# Altium PCB 4x4_Pan.PcbDoc
Units mm, origin at the board's own origin, x right, y up, seen from the top; angles counter-clockwise.
Board outline 200 x 200 mm, 2 copper layers (Top Layer, Bottom Layer); 36 components, 11 nets, 304 pads, 8 vias.
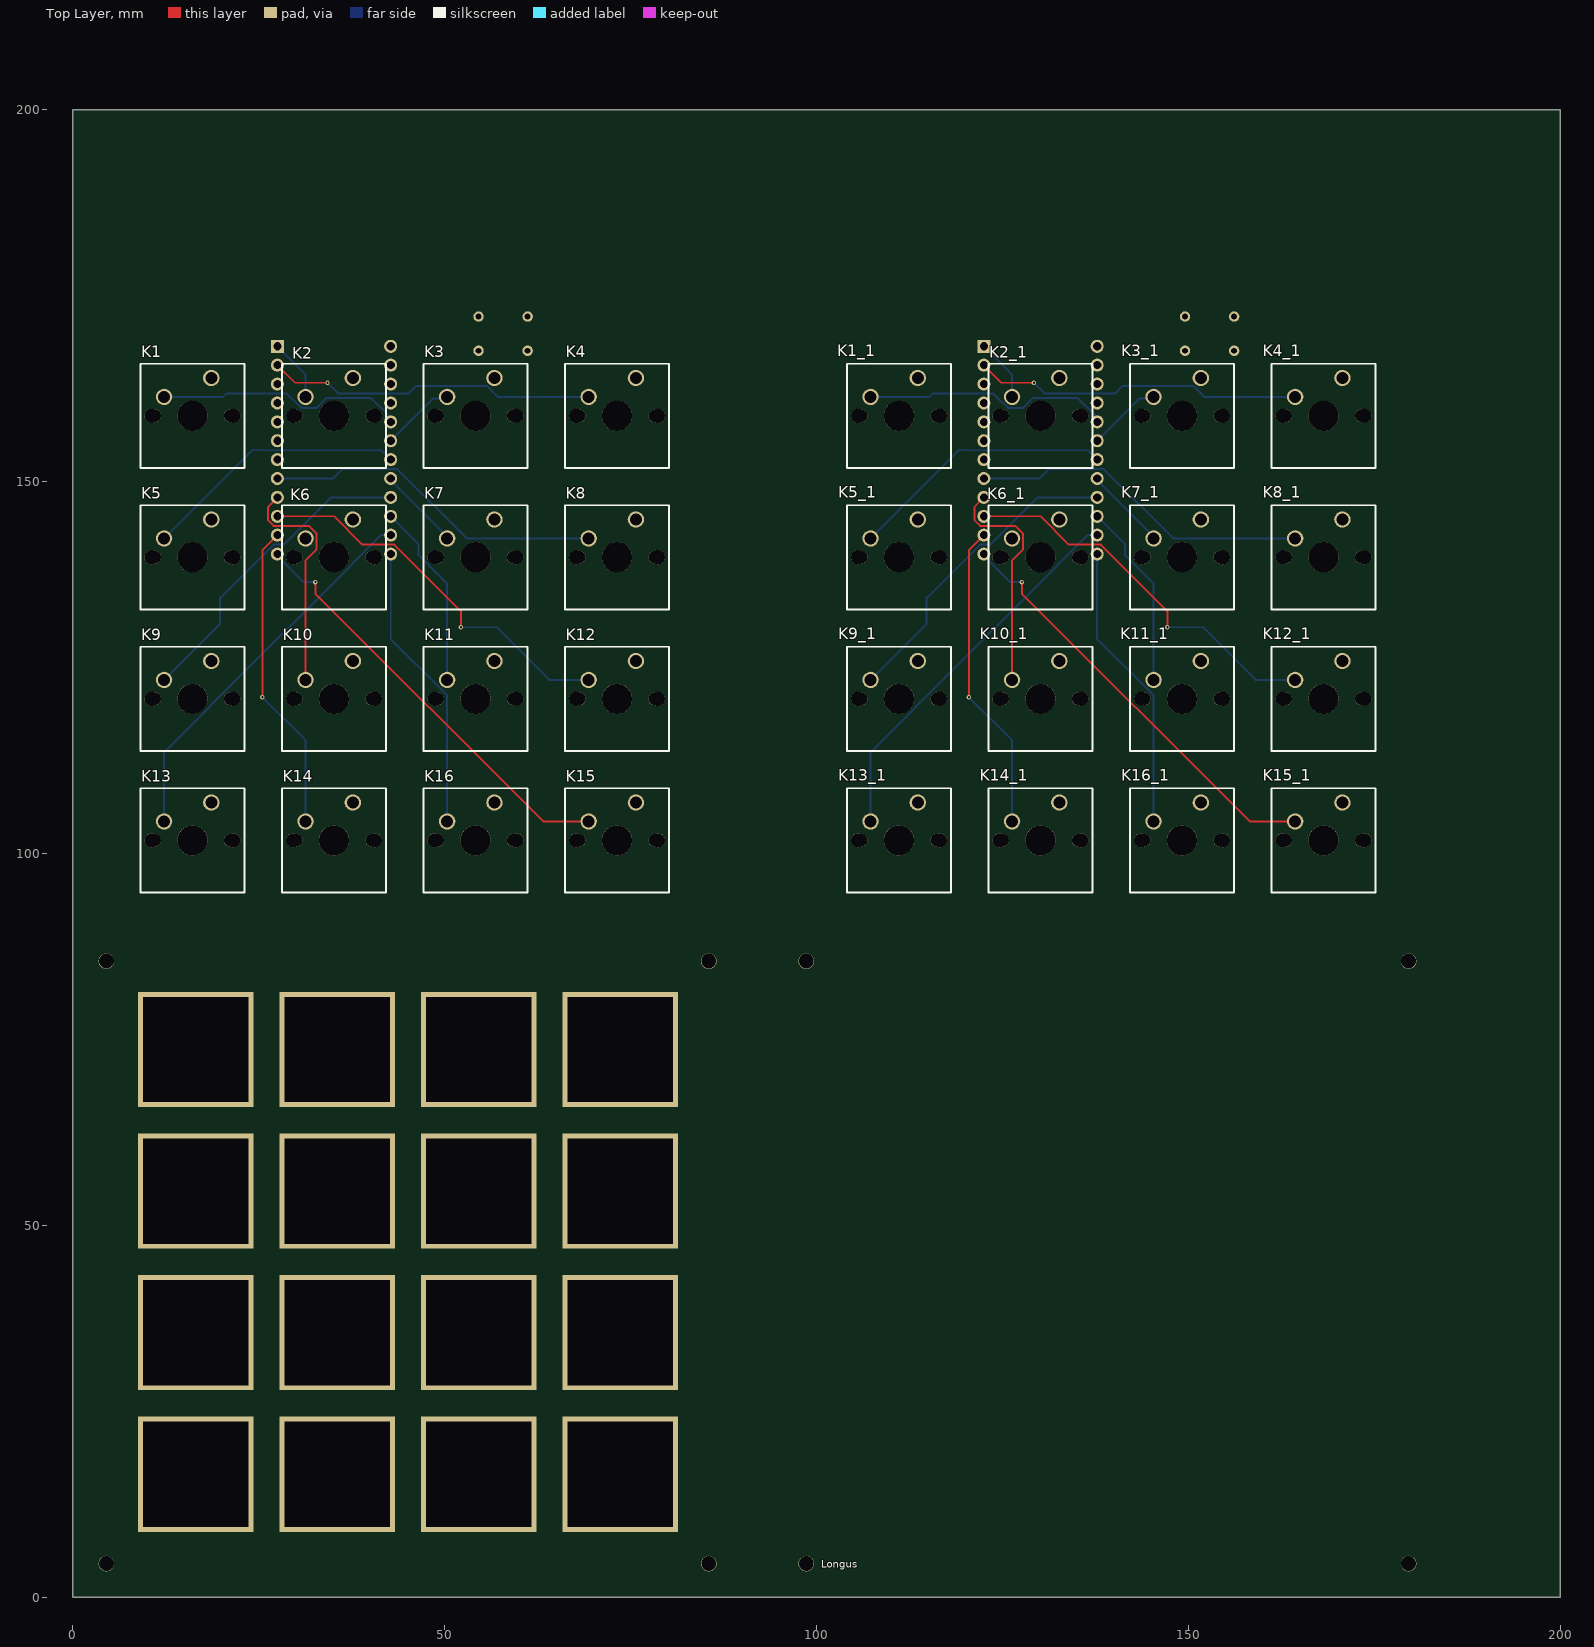
[diagram p0: Top Layer view]
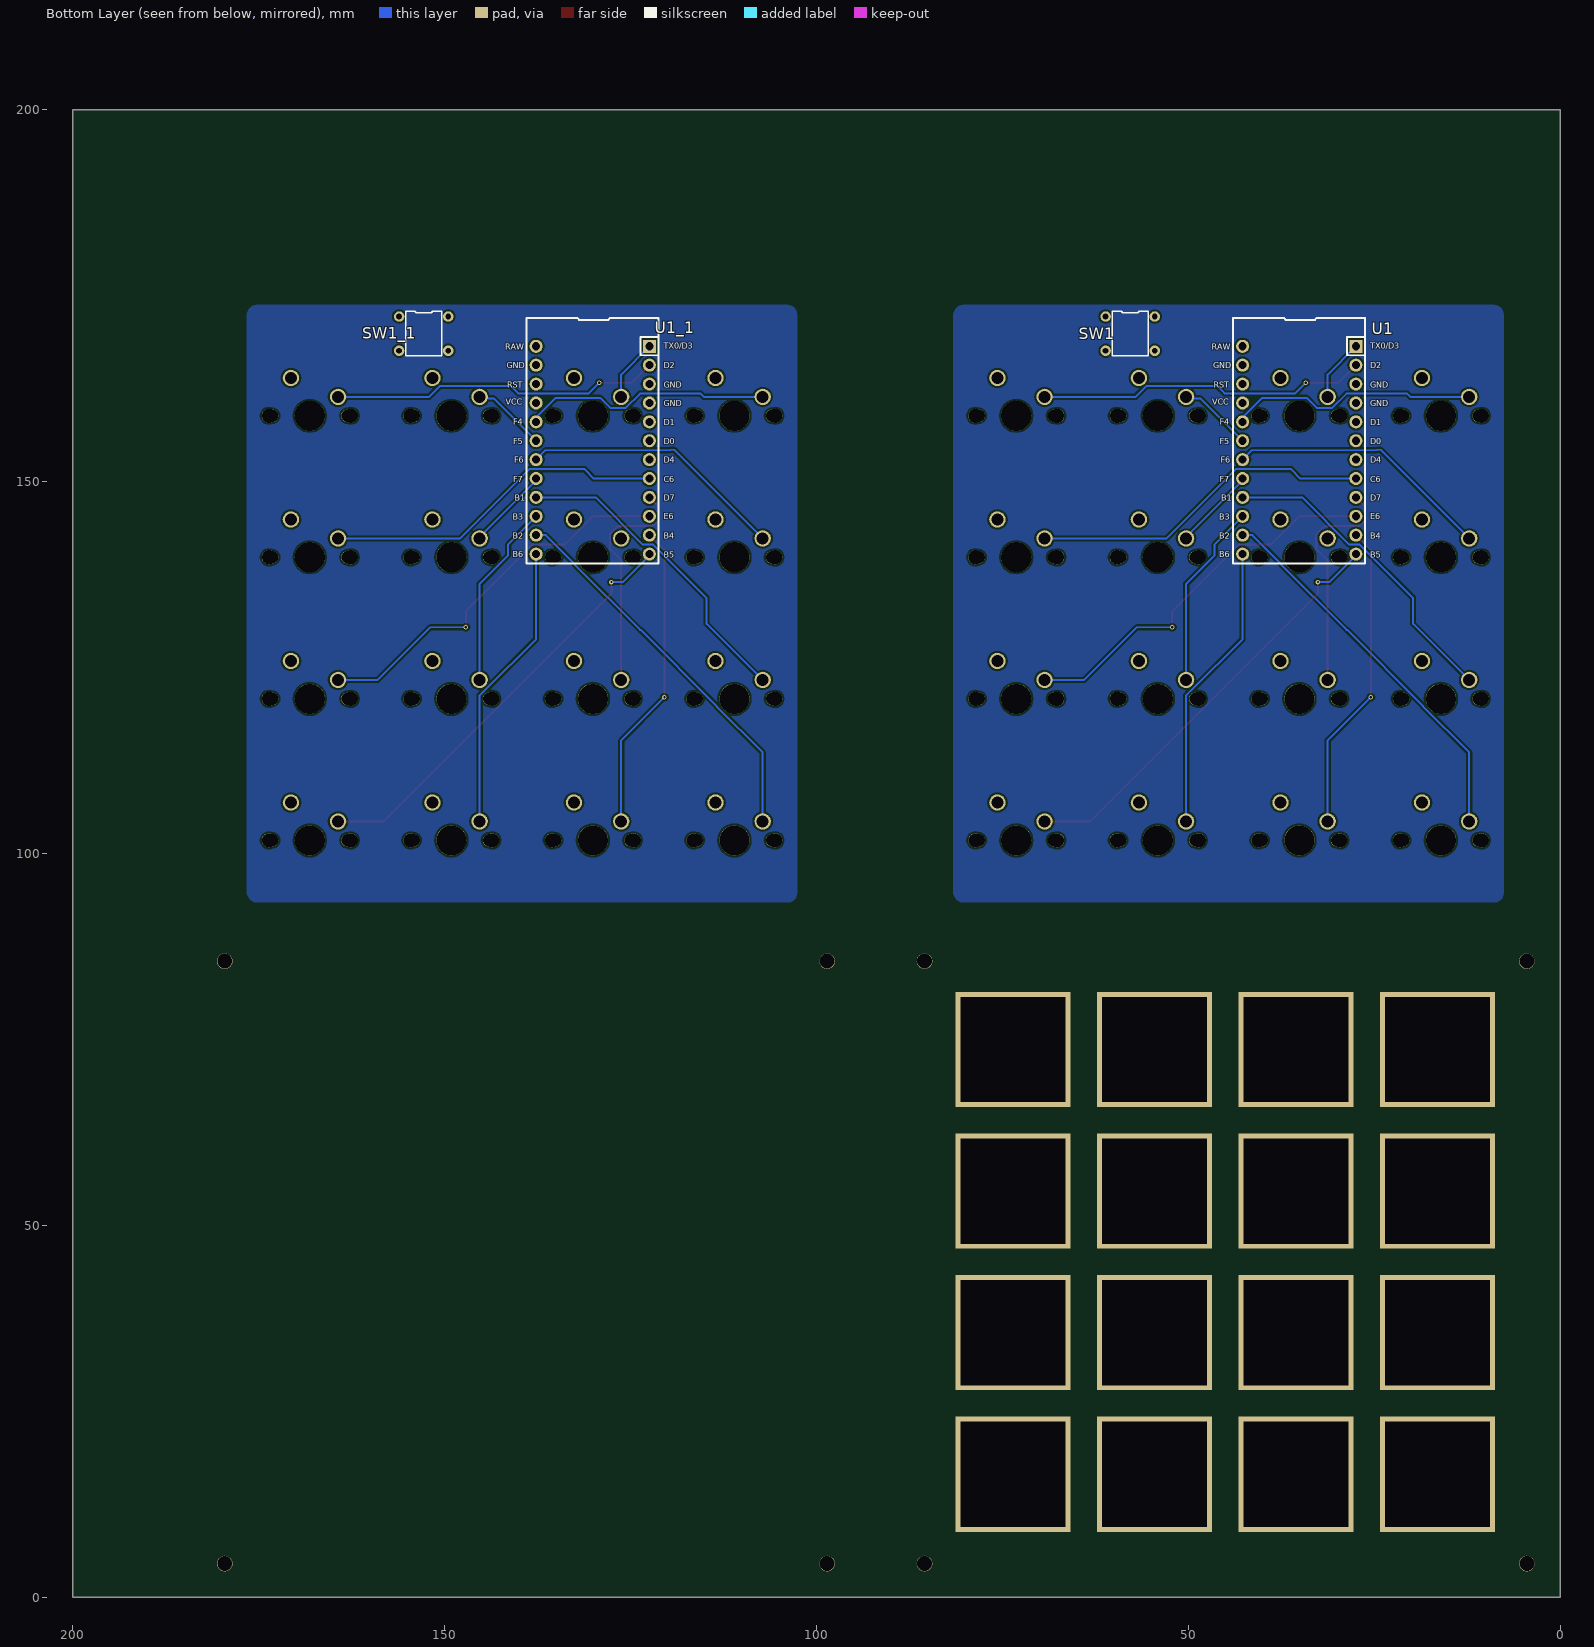
[diagram p1: Bottom Layer view, seen from below]

## Layer stack, top to bottom
Top Solder: solder mask 0.0102, Solder Resist, Dk 3.5
Top Layer: signal copper 0.0356
Dielectric 1: dielectric 0.32, FR-4, Dk 4.8
Bottom Layer: signal copper 0.0356
Bottom Solder: solder mask 0.0102, Solder Resist, Dk 3.5

## Board outline
0,0 0,200 200,200 200,0

## Design rules (kind name [scope] priority, off if disabled: settings)
Clearance [All] p1: gap=0.254 ignorepadtopadclearanceinfootprint=FALSE except(0: Arc-Hole Track-Hole SMDPad-Hole THPad-Hole Via-Hole Fill-Hole Poly-Hole Region-Hole Text-Hole)
PolygonConnect [All] p1: connectstyle=Relief reliefconductorwidth=0.254 reliefentries=4 polygonreliefangle="90 Angle" airgapwidth=0.254
RoutingVias [All] p1: holewidth=0.711 width=1.27 viastyle="Through Hole" minholewidth=0.711 minwidth=1.27 maxholewidth=0.711 maxwidth=1.27
SolderMaskExpansion [All] p1: expansion=0.102 istentingtop=FALSE
Width [All] p1: maxlimit=0.254 minlimit=0.254 preferedwidth=0.254
30 further rules are at their usual default settings.

## Classes and differential pairs
component class Macropadmod: SW?

## Components (designator, comment, footprint, x,y, rotation, side; value= is the part's Value field where it differs from the comment)
K1 "KEYSW-canadian_parts" Socket 9.015,151.842 r0 top
K1_1 "KEYSW-canadian_parts" Socket 104.015,151.842 r0 top (schematic designator K1)
K2 "KEYSW-canadian_parts" Socket 28.045,151.842 r0 top
K2_1 "KEYSW-canadian_parts" Socket 123.045,151.842 r0 top (schematic designator K2)
K3 "KEYSW-canadian_parts" Socket 47.075,151.842 r0 top
K3_1 "KEYSW-canadian_parts" Socket 142.074,151.842 r0 top (schematic designator K3)
K4 "KEYSW-canadian_parts" Socket 66.105,151.842 r0 top
K4_1 "KEYSW-canadian_parts" Socket 161.104,151.842 r0 top (schematic designator K4)
K5 "KEYSW-canadian_parts" Socket 9.015,132.812 r0 top
K5_1 "KEYSW-canadian_parts" Socket 104.014,132.812 r0 top (schematic designator K5)
K6 "KEYSW-canadian_parts" Socket 28.045,132.812 r0 top
K6_1 "KEYSW-canadian_parts" Socket 123.044,132.812 r0 top (schematic designator K6)
K7 "KEYSW-canadian_parts" Socket 47.075,132.812 r0 top
K7_1 "KEYSW-canadian_parts" Socket 142.075,132.812 r0 top (schematic designator K7)
K8 "KEYSW-canadian_parts" Socket 66.105,132.812 r0 top
K8_1 "KEYSW-canadian_parts" Socket 161.104,132.812 r0 top (schematic designator K8)
K9 "KEYSW-canadian_parts" Socket 9.015,113.782 r0 top
K9_1 "KEYSW-canadian_parts" Socket 104.014,113.782 r0 top (schematic designator K9)
K10 "KEYSW-canadian_parts" Socket 28.045,113.782 r0 top
K10_1 "KEYSW-canadian_parts" Socket 123.045,113.782 r0 top (schematic designator K10)
K11 "KEYSW-canadian_parts" Socket 47.075,113.782 r0 top
K11_1 "KEYSW-canadian_parts" Socket 142.075,113.782 r0 top (schematic designator K11)
K12 "KEYSW-canadian_parts" Socket 66.105,113.782 r0 top
K12_1 "KEYSW-canadian_parts" Socket 161.104,113.782 r0 top (schematic designator K12)
K13 "KEYSW-canadian_parts" Socket 9.015,94.752 r0 top
K13_1 "KEYSW-canadian_parts" Socket 104.014,94.752 r0 top (schematic designator K13)
K14 "KEYSW-canadian_parts" Socket 28.045,94.752 r0 top
K14_1 "KEYSW-canadian_parts" Socket 123.044,94.752 r0 top (schematic designator K14)
K15 "KEYSW-canadian_parts" Socket 66.105,94.752 r0 top
K15_1 "KEYSW-canadian_parts" Socket 161.104,94.752 r0 top (schematic designator K15)
K16 "KEYSW-canadian_parts" Socket 47.075,94.752 r0 top
K16_1 "KEYSW-canadian_parts" Socket 142.074,94.752 r0 top (schematic designator K16)
SW1 "SW_Push" RESET 59.635,166.485 r90 bottom
SW1_1 "SW_Push" RESET 154.635,166.485 r90 bottom (schematic designator SW1)
U1 "ProMicro-keebio" PRO-MICRO 42.725,168.185 r180 bottom
U1_1 "ProMicro-keebio" PRO-MICRO 137.725,168.185 r180 bottom (schematic designator U1)

## Footprints (in the part's own frame and the unit in brackets; to place one, negate y for a bottom-side part, rotate by r counter-clockwise, add the part's x,y. Pads: shape width x height; smd on the part's side, far side on the other; paste and mask are expansions set on the pad)
PRO-MICRO [mm]
  rect 1.753x1.753 hole 1.092: 1(15.24,0)
  round 1.753 hole 1.092: 2(15.24,-2.54) 3(15.24,-5.08) 4(15.24,-7.62) 5(15.24,-10.16) 6(15.24,-12.7) 7(15.24,-15.24) 8(15.24,-17.78) 9(15.24,-20.32) 10(15.24,-22.86) 11(15.24,-25.4) 12(15.24,-27.94) 13(0,-27.94) 14(0,-25.4) 15(0,-22.86) 16(0,-20.32) 17(0,-17.78) 18(0,-15.24) 19(0,-12.7) 20(0,-10.16) 21(0,-7.62) 22(0,-5.08) 23(0,-2.54) 24(0,0)
  silkscreen extent -1.27,-29.21 16.48,3.81
RESET [mm]
  round 1.4 hole 0.8: 1(5.7,1.5) 2(5.7,-5.1) 3(1.1,1.5) 4(1.1,-5.1)
  silkscreen extent 0.4,-4.2 6.4,0.6
Socket [mm]
  round 2.2 hole 1.6: 1(3.24,9.54) 2(9.59,12.08)
  round 1.9 hole 1.9: 3(1.55,7) 3(12.55,7)
  round 1.7 hole 1.7: 3(1.97,7) 3(12.13,7)
  round 4.05 hole 4.05: 3(7.05,7)
  silkscreen extent 0.05,0 14.05,14

## Free pads (board coordinates)
  round 2.1 hole 2: 3(4.495,4.502) 3(4.495,85.502) 3(85.495,4.502) 3(85.495,85.502) 3(98.595,4.502) 3(98.595,85.502) 3(179.595,4.502) 3(179.595,85.502)
  rect 15.5x15.5 hole 14.1 square: 4(16.505,16.527) 4(16.505,35.557) 4(16.505,54.587) 4(16.505,73.617) 4(35.535,16.527) 4(35.535,35.557) 4(35.535,54.587) 4(35.535,73.617) 4(54.564,16.527) 4(54.564,35.557) 4(54.564,54.587) 4(54.564,73.617) 4(73.594,16.527) 4(73.594,35.557) 4(73.594,54.587) 4(73.594,73.617)

## Via types
v1: diameter 0.6, hole 0.3, Top Layer to Bottom Layer, 8 vias

## Nets (pads, with @x,y where several pads share a name; then routed paths per layer and width w, separated by ;. In a path a pad name is that pad's centre, name@x,y a point inside that pad or via, vN(x,y) a via of type N, cw(c..) or ccw(c..) an arc to the next point about the centre after c; other vN are vias at no path point)
GND: 
NetK1_1: 
NetK2_1: 
NetK3_1: 
NetK4_1: 
NetK5_1: 
NetK6_1: 
NetK7_1: 
NetK8_1: 
NetK9_1: 
NetSW1_1: 
pads on no net: K1.1 K1.2 K1.3 K1_1.1 K1_1.2 K1_1.3 K2.1 K2.2 K2.3 K2_1.1 K2_1.2 K2_1.3 K3.1 K3.2 K3.3 K3_1.1 K3_1.2 K3_1.3 K4.1 K4.2 K4.3 K4_1.1 K4_1.2 K4_1.3 K5.1 K5.2 K5.3 K5_1.1 K5_1.2 K5_1.3 K6.1 K6.2 K6.3 K6_1.1 K6_1.2 K6_1.3 K7.1 K7.2 K7.3 K7_1.1 K7_1.2 K7_1.3 K8.1 K8.2 K8.3 K8_1.1 K8_1.2 K8_1.3 K9.1 K9.2 K9.3 K9_1.1 K9_1.2 K9_1.3 K10.1 K10.2 K10.3 K10_1.1 K10_1.2 K10_1.3 K11.1 K11.2 K11.3 K11_1.1 K11_1.2 K11_1.3 K12.1 K12.2 K12.3 K12_1.1 K12_1.2 K12_1.3 K13.1 K13.2 K13.3 K13_1.1 K13_1.2 K13_1.3 K14.1 K14.2 K14.3 K14_1.1 K14_1.2 K14_1.3 K15.1 K15.2 K15.3 K15_1.1 K15_1.2 K15_1.3 K16.1 K16.2 K16.3 K16_1.1 K16_1.2 K16_1.3 SW1.1 SW1.2 SW1.3 SW1.4 SW1_1.1 SW1_1.2 SW1_1.3 SW1_1.4 U1.1 U1.2 U1.3 U1.4 U1.5 U1.6 U1.7 U1.8 U1.9 U1.10 U1.11 U1.12 U1.13 U1.14 U1.15 U1.16 U1.17 U1.18 U1.19 U1.20 U1.21 U1.22 U1.23 U1.24 U1_1.1 U1_1.2 U1_1.3 U1_1.4 U1_1.5 U1_1.6 U1_1.7 U1_1.8 U1_1.9 U1_1.10 U1_1.11 U1_1.12 U1_1.13 U1_1.14 U1_1.15 U1_1.16 U1_1.17 U1_1.18 U1_1.19 U1_1.20 U1_1.21 U1_1.22 U1_1.23 U1_1.24
copper on no net: | length 1063.4
  Top Layer w0.254: v1(25.475,121) 25.475,140.775 27.485,142.785 ; 27.485,145.325 35.107,145.325 38.905,141.527 43.221,141.527 52.175,132.573 v1(52.175,130.4) ; 27.485,147.865 26.228,146.607 26.228,144.804 26.989,144.043 31.688,144.043 32.766,142.965 32.766,140.886 31.285,139.405 31.285,123.322 ; 27.485,165.645 29.855,163.275 v1(34.225,163.275) ; v1(32.6,136.475) 32.6,134.924 63.232,104.292 69.345,104.292 ; v1(120.475,121) 120.475,140.775 122.485,142.785 ; 122.485,145.325 130.107,145.325 133.905,141.527 138.221,141.527 147.175,132.573 v1(147.175,130.4) ; 122.485,147.865 121.227,146.607 121.227,144.804 121.989,144.043 126.688,144.043 127.766,142.965 127.766,140.886 126.285,139.405 126.285,123.322 ; 122.485,165.645 124.855,163.275 v1(129.225,163.275) ; v1(127.6,136.475) 127.6,134.924 158.232,104.292 164.344,104.292
  Bottom Layer w0.254: 12.255,104.292 12.255,113.569 18.471,119.785 18.471,119.849 28.675,130.054 28.739,130.054 37.501,138.815 37.501,138.879 41.407,142.785 42.725,142.785 ; 12.255,123.322 19.795,130.863 19.795,134.334 26.989,141.527 28.366,141.527 34.703,147.865 42.725,147.865 ; 12.255,142.352 24.178,154.275 24.635,154.275 24.707,154.203 41.468,154.203 42.725,152.945 ; 12.255,161.382 20.173,161.382 20.614,161.823 28.75,161.823 30.671,159.901 32.751,159.901 34.098,161.248 40.071,161.248 42.438,158.881 42.438,158.312 42.725,158.025 ; v1(25.475,121) 31.285,115.19 31.285,104.292 ; 27.485,140.245 27.485,140.039 31.049,136.475 v1(32.6,136.475) ; 27.485,150.405 34.94,150.405 36.197,151.663 43.638,151.663 52.948,142.352 69.345,142.352 ; 27.485,168.185 31.285,164.385 31.285,161.382 ; v1(34.225,163.275) 35.653,161.847 45.133,161.847 46.149,162.863 55.629,162.863 57.11,161.382 69.345,161.382 ; 42.725,140.245 42.725,128.817 49.701,121.841 49.727,121.841 50.315,121.253 50.315,104.292 ; 42.725,145.325 46.477,141.573 46.477,140.077 50.315,136.24 50.315,123.322 ; 42.725,150.405 42.725,150.173 50.315,142.584 50.315,142.352 ; 42.725,155.485 48.428,161.188 50.12,161.188 50.315,161.382 ; v1(52.175,130.4) 56.957,130.4 64.035,123.322 69.345,123.322 ; 107.254,104.292 107.254,113.569 113.47,119.785 113.47,119.849 123.675,130.054 123.739,130.054 132.5,138.815 132.5,138.879 136.407,142.785 137.725,142.785 ; 107.254,123.322 114.795,130.863 114.795,134.334 121.989,141.527 123.366,141.527 129.703,147.865 137.725,147.865 ; 107.254,142.352 119.177,154.275 119.635,154.275 119.707,154.203 136.467,154.203 137.725,152.945 ; 107.255,161.382 115.173,161.382 115.614,161.823 123.75,161.823 125.671,159.901 127.751,159.901 129.098,161.248 135.071,161.248 137.438,158.881 137.438,158.312 137.725,158.025 ; v1(120.475,121) 126.284,115.19 126.284,104.292 ; 122.485,140.245 122.485,140.039 126.049,136.475 v1(127.6,136.475) ; 122.485,150.405 129.94,150.405 131.197,151.663 138.638,151.663 147.948,142.352 164.344,142.352 ; 122.485,168.185 126.285,164.385 126.285,161.382 ; v1(129.225,163.275) 130.652,161.847 140.133,161.847 141.149,162.863 150.629,162.863 152.11,161.382 164.344,161.382 ; 137.725,140.245 137.725,128.817 144.701,121.841 144.727,121.841 145.314,121.253 145.314,104.292 ; 137.725,145.325 141.477,141.573 141.477,140.077 145.315,136.24 145.315,123.322 ; 137.725,150.405 137.725,150.173 145.315,142.584 145.315,142.352 ; 137.725,155.485 143.428,161.188 145.12,161.188 145.314,161.382 ; v1(147.175,130.4) 151.957,130.4 159.035,123.322 164.344,123.322

## Polygon pours and split planes (outlines as drawn)
no net on Top Layer "NONET_L01_P003" (solid, pour order 3): 16.495,69.602
no net on Top Layer "NONET_L01_P002" (solid, pour order 2): 110.595,69.602
no net on Bottom Layer "NONET_L02_P007" (solid, pour order 7): 102.6,172.375 cw(c104,172.375) 104,173.775 175.2,173.775 cw(c175.2,172.375) 176.6,172.375 176.6,94.8 cw(c175.2,94.8) 175.2,93.4 103.95,93.4 cw(c103.95,94.75) 102.6,94.75
no net on Bottom Layer "NONET_L02_P006" (solid, pour order 6): 110.775,173.775
no net on Bottom Layer "NONET_L02_P005" (solid, pour order 5): 7.6,172.375 cw(c9,172.375) 9,173.775 80.2,173.775 cw(c80.2,172.375) 81.6,172.375 81.6,94.8 cw(c80.2,94.8) 80.2,93.4 8.95,93.4 cw(c8.95,94.75) 7.6,94.75
no net on Bottom Layer "NONET_L02_P004" (solid, pour order 4): 15.775,173.775

## Other copper
Top Layer:
  region: 146.878,207.896

## Silkscreen, mask and mechanical layers (free items; w line width, h text height)
Top Overlay:
  text "Longus" at 100.644,3.917 h1
Mechanical 1:
  lines w0.254: 3.088,0.157 86.993,0.127 ; 3.089,0.159 cw(c3.089,3.121) 0.127,3.121 0.127,87.031 cw(c3.093,87.031) 3.093,89.997 ; 3.093,90.002 87.016,90.002 cw(c87.016,87.023) 89.995,87.023 89.995,3.13 ; 7.597,94.797 ccw(c8.997,94.797) 8.997,93.397 ; 7.6,172.375 7.602,94.797 ; 7.602,172.375 cw(c9.003,172.375) 9.003,173.776 ; 8.997,93.402 80.2,93.402 ; 9.004,173.775 80.197,173.775 ; 80.198,93.401 ccw(c80.198,94.81) 81.606,94.81 ; 80.203,173.772 cw(c80.203,172.375) 81.6,172.375 ; 81.606,94.775 81.606,172.4 ; 86.994,0.127 ccw(c86.994,3.13) 89.997,3.13 ; 97.188,0.157 181.093,0.127 ; 97.189,0.159 cw(c97.189,3.121) 94.227,3.121 94.227,87.031 cw(c97.193,87.031) 97.193,89.997 ; 97.193,90.002 181.116,90.002 cw(c181.116,87.023) 184.095,87.023 184.095,3.13 ; 102.597,94.797 ccw(c103.997,94.797) 103.997,93.397 ; 102.6,172.375 102.602,94.797 ; 102.602,172.375 cw(c104.003,172.375) 104.003,173.776 ; 103.997,93.402 175.2,93.402 ; 104.004,173.775 175.197,173.775 ; 175.198,93.401 ccw(c175.198,94.81) 176.606,94.81 ; 175.203,173.772 cw(c175.203,172.375) 176.6,172.375 ; 176.606,94.775 176.606,172.4 ; 181.094,0.127 ccw(c181.094,3.13) 184.097,3.13

## Text inside footprints (layer, text, board x,y; h text height)
U1: Bottom Overlay "F6" at 45.675,152.535 h0.8; Bottom Overlay "GND" at 25.575,162.635 h0.8; Bottom Overlay "RAW" at 46.875,167.735 h0.8; Bottom Overlay "GND" at 46.675,165.235 h0.8; Bottom Overlay "RST" at 46.575,162.635 h0.8; Bottom Overlay "VCC" at 46.775,160.335 h0.8; Bottom Overlay "F4" at 45.775,157.635 h0.8; Bottom Overlay "F5" at 45.775,155.035 h0.8; Bottom Overlay "F7" at 45.775,149.935 h0.8; Bottom Overlay "B1" at 45.575,147.435 h0.8; Bottom Overlay "B3" at 45.875,144.835 h0.8; Bottom Overlay "B2" at 45.875,142.335 h0.8; Bottom Overlay "B6" at 45.875,139.835 h0.8; Bottom Overlay "D2" at 25.575,165.235 h0.8; Bottom Overlay "GND" at 25.575,160.135 h0.8; Bottom Overlay "D1" at 25.575,157.535 h0.8; Bottom Overlay "D0" at 25.575,155.035 h0.8; Bottom Overlay "D4" at 25.575,152.535 h0.8; Bottom Overlay "C6" at 25.575,149.935 h0.8; Bottom Overlay "D7" at 25.575,147.435 h0.8; Bottom Overlay "TX0/D3" at 25.575,167.849 h0.8; Bottom Overlay "E6" at 25.575,144.935 h0.8; Bottom Overlay "B4" at 25.575,142.335 h0.8; Bottom Overlay "B5" at 25.575,139.735 h0.8
U1_1: Bottom Overlay "F6" at 140.675,152.535 h0.8; Bottom Overlay "GND" at 120.575,162.635 h0.8; Bottom Overlay "RAW" at 141.875,167.735 h0.8; Bottom Overlay "GND" at 141.675,165.235 h0.8; Bottom Overlay "RST" at 141.575,162.635 h0.8; Bottom Overlay "VCC" at 141.775,160.335 h0.8; Bottom Overlay "F4" at 140.775,157.635 h0.8; Bottom Overlay "F5" at 140.775,155.035 h0.8; Bottom Overlay "F7" at 140.775,149.935 h0.8; Bottom Overlay "B1" at 140.575,147.435 h0.8; Bottom Overlay "B3" at 140.875,144.835 h0.8; Bottom Overlay "B2" at 140.875,142.335 h0.8; Bottom Overlay "B6" at 140.875,139.835 h0.8; Bottom Overlay "D2" at 120.575,165.235 h0.8; Bottom Overlay "GND" at 120.575,160.135 h0.8; Bottom Overlay "D1" at 120.575,157.535 h0.8; Bottom Overlay "D0" at 120.575,155.035 h0.8; Bottom Overlay "D4" at 120.575,152.535 h0.8; Bottom Overlay "C6" at 120.575,149.935 h0.8; Bottom Overlay "D7" at 120.575,147.435 h0.8; Bottom Overlay "TX0/D3" at 120.575,167.849 h0.8; Bottom Overlay "E6" at 120.575,144.935 h0.8; Bottom Overlay "B4" at 120.575,142.335 h0.8; Bottom Overlay "B5" at 120.575,139.735 h0.8